# Altium PCB PCB2.PcbDoc (part 1 of 2)
Units mm, origin at the board's own origin, x right, y up, seen from the top; angles counter-clockwise.
Board outline 85.12 x 55.68 mm, 2 copper layers (Top Layer, Bottom Layer), stack 1.569 mm thick; 61 components, 48 nets, 258 pads, 369 vias.
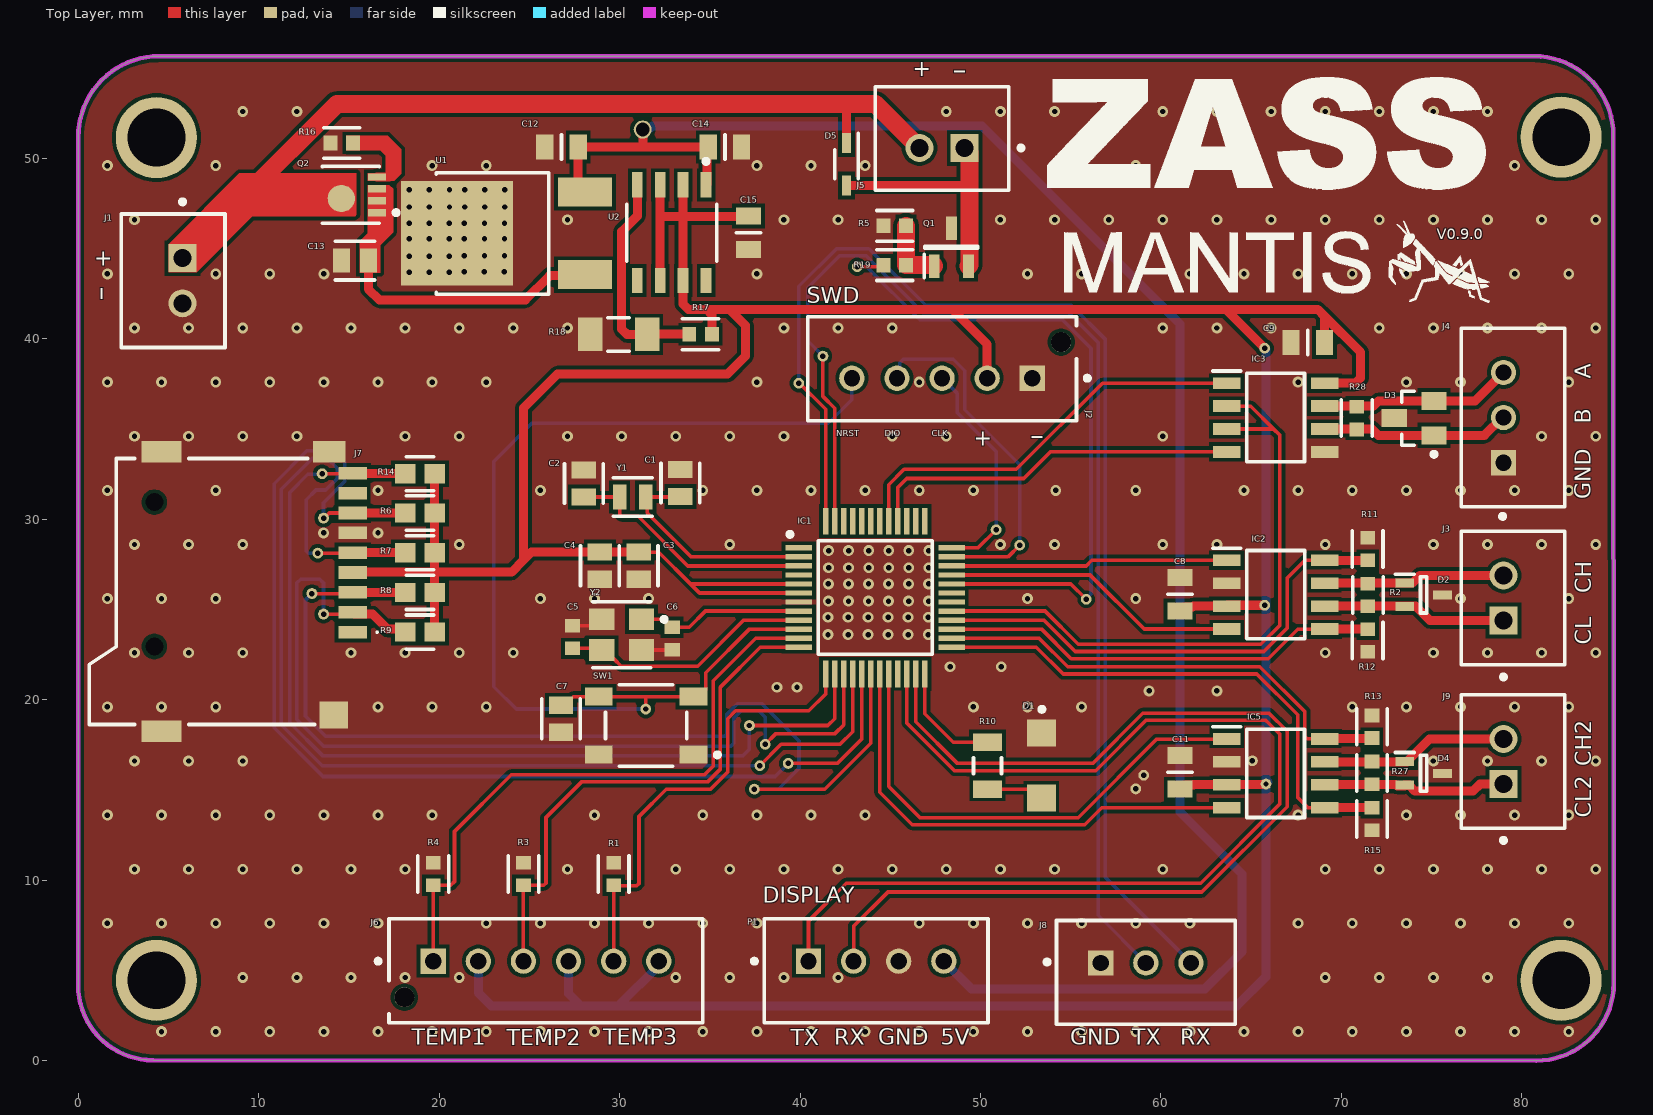
[diagram p0: Top Layer view]
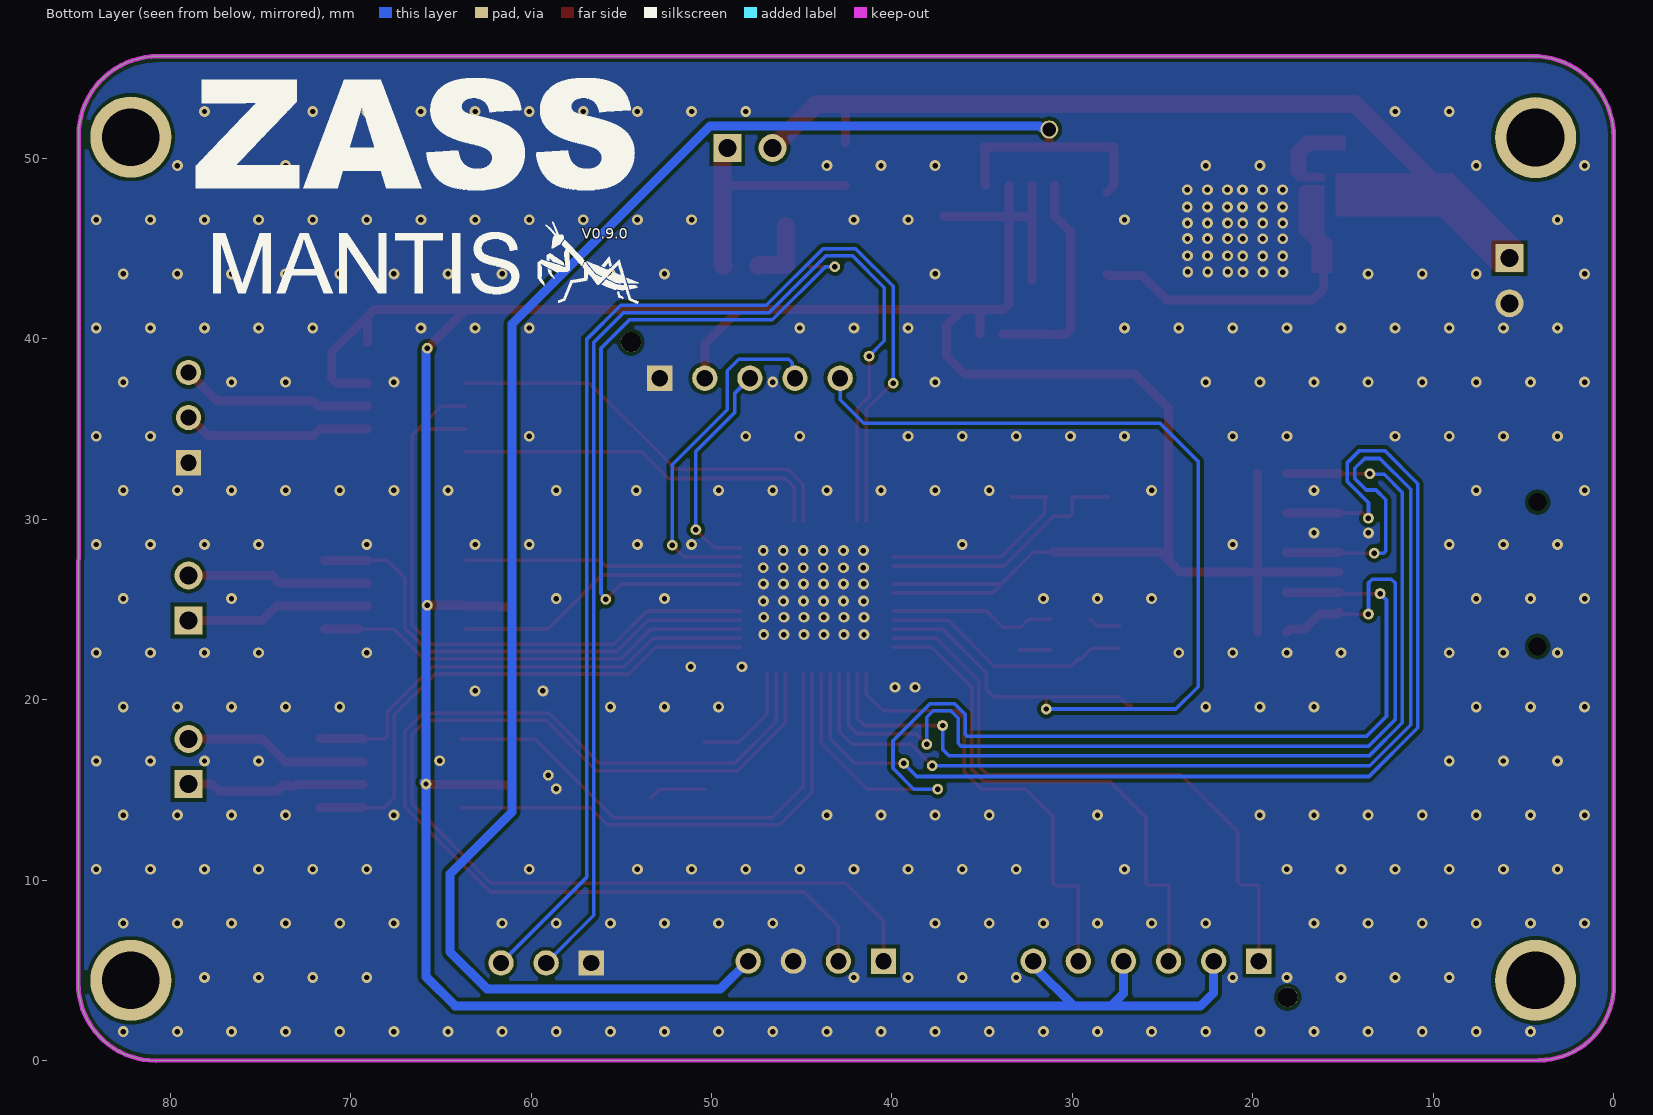
[diagram p1: Bottom Layer view, seen from below]
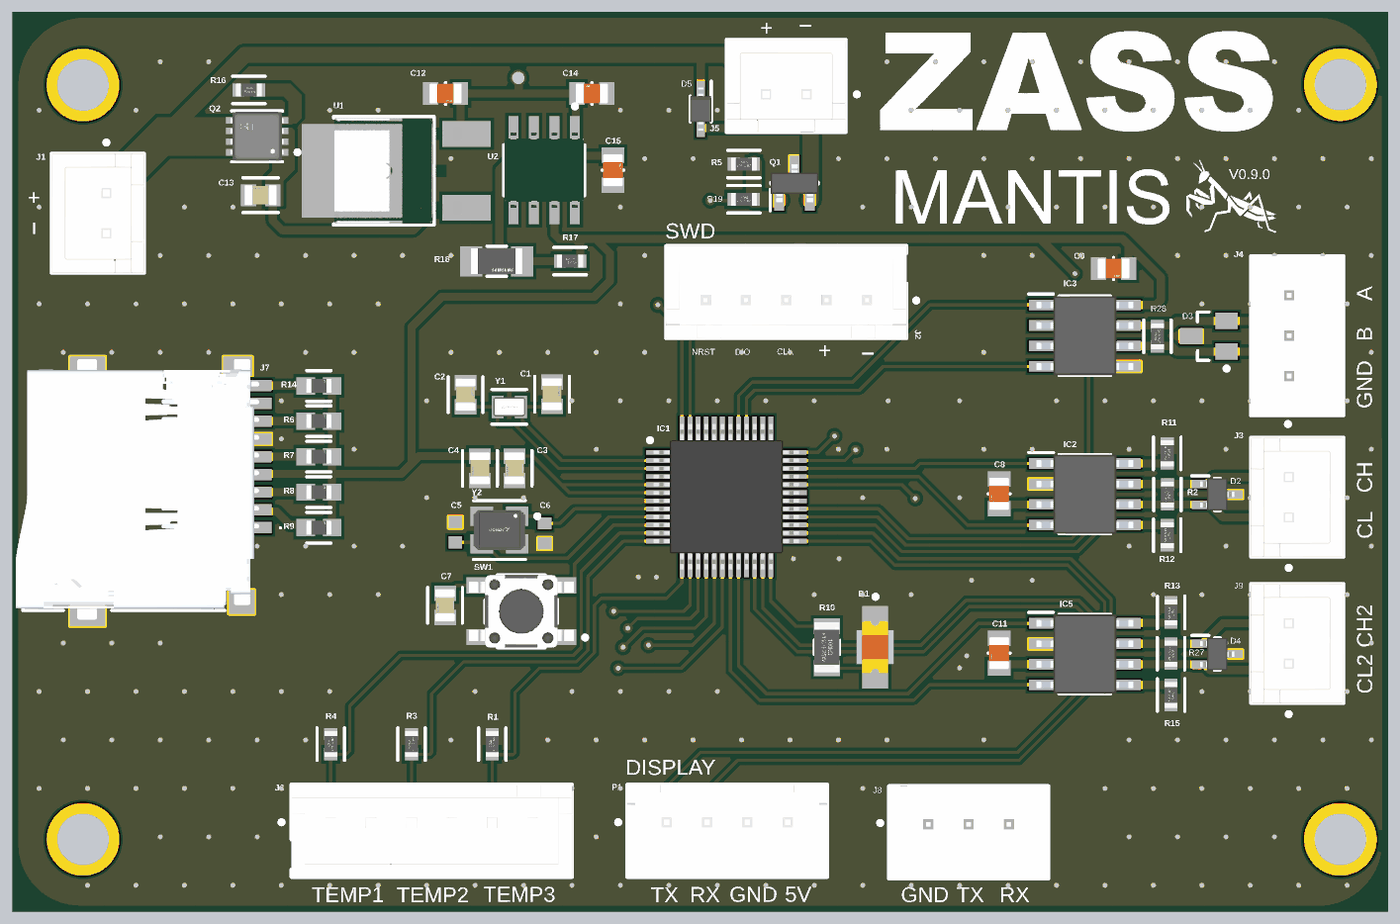
[diagram p2: 3D render of the assembled board from above, using the file's embedded part models]

## Layer stack, top to bottom
Top Solder: solder mask 0.0254, SM-001, Dk 4
Top Layer: signal copper 0.035
Dielectric 1: core 1.4986, Core-043, Dk 4.3
Bottom Layer: signal copper 0.035
Bottom Solder: solder mask 0.0254, SM-001, Dk 4

## Board outline
4.133,0.011 cw(c4.133,4.163) -0.02,4.163 -0.017,51.184 cw(c4.464,51.184) 4.464,55.665 80.681,55.665 cw(c80.681,51.269) 85.077,51.269 85.099,4.284 cw(c80.805,4.284) 80.805,-0.011

## Design rules (kind name [scope] priority, off if disabled: settings)
Clearance [All] p1: gap=0.2 ignorepadtopadclearanceinfootprint=FALSE
PolygonConnect PolygonConnect_4 [All vs IsNamedPolygon('Top Layer-GND')] p1: connectstyle=Direct reliefconductorwidth=0.254 reliefentries=4 polygonreliefangle="90 Angle" airgapwidth=0.254
PolygonConnect PolygonConnect_3 [All vs IsNamedPolygon('Top Layer-GND')] p2: connectstyle=Direct reliefconductorwidth=0.254 reliefentries=4 polygonreliefangle="90 Angle" airgapwidth=0.254
PolygonConnect PolygonConnect_2 [All vs IsNamedPolygon('Bottom Layer-GND')] p3: connectstyle=Direct reliefconductorwidth=0.254 reliefentries=4 polygonreliefangle="90 Angle" airgapwidth=0.254
PolygonConnect PolygonConnect_1 [All vs IsNamedPolygon('Top Layer-GND')] p4: connectstyle=Direct reliefconductorwidth=0.254 reliefentries=4 polygonreliefangle="90 Angle" airgapwidth=0.254
PolygonConnect [All] p5: connectstyle=Relief reliefconductorwidth=0.254 reliefentries=4 polygonreliefangle="90 Angle" airgapwidth=0.254
RoutingVias [All] p1: holewidth=0.711 width=1.27 viastyle="Through Hole" minholewidth=0.711 minwidth=1.27 maxholewidth=0.711 maxwidth=1.27
SolderMaskExpansion [All] p1: expansion=0.102 istentingtop=FALSE
SupplyNets "Schematic Supply Nets_2" [InNet('GND')] p1: voltage=0.000
SupplyNets "Schematic Supply Nets_1" [InNet('+5')] p2: voltage=0.000
SupplyNets "Schematic Supply Nets" [InNet('VDD')] p3: voltage=0.000
Width [All] p1: maxlimit=1 minlimit=0.2 preferedwidth=0.5 minimp=50.000000 maximp=50.000000 favimp=50.000000
30 further rules are at their usual default settings.

## Classes and differential pairs
component class U_STM32G0B1CBT6TR: C1 C2 C3 C4 C5 C6 C7 D1 IC1 R10 SW1 Y1 Y2
component class U_POWER: C12 C13 C14 C15 Q2 R16 R17 R18 U1 U2
component class U_COMM: C8 C9 C11 D2 D3 D4 IC2 IC3 IC5 R11 R12 R13 R15
component class MAIN: D5 J1 J2 J3 J4 J5 J6 J7 J8 J9 P1 Q1 R1 R2 R3 R4 R5 R6 R7 R8 R9 R19 R27 R28

## Components (designator, comment, footprint, x,y, rotation, side; value= is the part's Value field where it differs from the comment)
C1 "C0805C519D3HACTU" FP-C0805C-DN-MFG 33.362,32.012 r270 top value="5.1 pF"
C2 "C0805C519D3HACTU" FP-C0805C-DN-MFG 28.009,31.982 r270 top value="5.1 pF"
C3 "C0805C104K5RACTU" FP-C0805C-DN-MFG 31.044,27.423 r90 top value="0.10 μF"
C4 "C0805C104K5RACTU" FP-C0805C-DN-MFG 28.899,27.423 r90 top value="0.10 μF"
C5 "GRM1885C1H100JA01D" CAPC1608X90X35LL10T15 27.379,23.465 r270 top
C6 "GRM1885C1H100JA01D" CAPC1608X90X35LL10T15 32.907,23.391 r90 top
C7 "C0805C104K5RACTU" FP-C0805C-DN-MFG 26.74,18.939 r90 top value="0.10 μF"
C8 "CC0805KRX7R5BB104" FP-CC0805-EA-MFG 61.052,25.842 r90 top
C9 "CC0805KRX7R5BB104" FP-CC0805-EA-MFG 68.138,39.8 r180 top
C11 "CC0805KRX7R5BB104" FP-CC0805-EA-MFG 61.052,15.977 r90 top
C12 "CC0805KRX7R5BB104" FP-CC0805-EA-MFG 26.77,50.631 r180 top
C13 "C0805C104K5RACTU" FP-C0805C-DN-MFG 15.321,44.337 r0 top value="0.10 μF"
C14 "CC0805KRX7R5BB104" FP-CC0805-EA-MFG 35.831,50.631 r0 top
C15 "CC0805KRX7R5BB104" FP-CC0805-EA-MFG 37.136,45.883 r270 top
D1 "LTST-C230EKT" FP-LTST-C230EKT-MFG 53.371,16.34 r270 top
D2 "ESDCAN06-2BWY" SOT65P210X110-3N 74.56,25.802 r0 top
D3 "SM712.TCT" SMTC-SOT23-3_V 74.035,35.6 r180 top
D4 "ESDCAN06-2BWY" SOT65P210X110-3N 74.56,15.917 r0 top
D5 "1N4007WS" SOD2613X110N 42.573,49.672 r270 top
IC1 "STM32G0B1CBT6TR" QFP50P900X900X160-48N 44.16,25.66 r0 top
IC2 "TCAN3414DR" SOIC127P600X175-8N 66.357,25.818 r0 top
IC3 "SP3485EN-L" SOIC127P600X175-8N 66.357,35.635 r0 top
IC5 "TCAN3414DR" SOIC127P600X175-8N 66.357,15.917 r0 top
J1 "B2B-XH-A(LF)(SN)" FP-B2B-XH-A_LF_SN-MFG 5.24,43.22 r270 top
J2 "B5B-XH-AM(LF)(SN)" FP-B5B-XH-AM_LF_SN-MFG 47.865,38.34 r0 top
J3 "B2B-XH-A(LF)(SN)" FP-B2B-XH-A_LF_SN-MFG 79.508,25.632 r90 top
J4 "B3B-XH-A(LF)(SN)" FP-B3B-XH-A_LF_SN-MFG 79.508,35.635 r90 top
J5 "S2B-XH-A(LF)(SN)" FP-B2B-XH-A_LF_SN-MFG 47.865,51.105 r180 top
J6 "B6B-XH-AM(LF)(SN)" FP-B6B-XH-AM_LF_SN-MFG 25.909,4.975 r180 top
J7 "MSD-4-A" MSD4A 8.299,25.993 r270 top
J8 "B3B-XH-A(LF)(SN)" FP-B3B-XH-A_LF_SN-MFG 59.16,4.88 r0 top
J9 "B2B-XH-A(LF)(SN)" FP-B2B-XH-A_LF_SN-MFG 79.508,16.572 r90 top
P1 "B4B-XH-A(LF)(SN)" FP-B4B-XH-A_LF_SN-MFG 44.21,4.975 r180 top
Q1 "AO3422" SOT95P237X112-3N 48.38,45.08 r90 top
Q2 "SI7113ADN-T1-GE3" FP-S16-2667-SINGLE-MFG 15.1,47.982 r180 top
R1 "CRGCQ0603J10K" FP-CRGCQ0603-IPC_C 29.659,10.34 r90 top value=10KΩ
R2 "CRGCQ0603F120R" FP-CRGCQ0603-IPC_C 71.468,25.802 r270 top value=120Ω
R3 "CRGCQ0603J10K" FP-CRGCQ0603-IPC_C 24.659,10.34 r90 top value=10KΩ
R4 "CRGCQ0603J10K" FP-CRGCQ0603-IPC_C 19.659,10.34 r90 top value=10KΩ
R5 "CRGCQ0603J10K" FP-CRGCQ0603-IPC_C 45.241,46.265 r0 top value=10KΩ
R6 "CRCW06034K70FKEA" FP-CRCW0603-e3-IPC_A 18.926,30.343 r0 top
R7 "CRCW06034K70FKEA" FP-CRCW0603-e3-IPC_A 18.926,28.143 r0 top
R8 "CRCW06034K70FKEA" FP-CRCW0603-e3-IPC_A 18.926,25.943 r0 top
R9 "CRCW06034K70FKEA" FP-CRCW0603-e3-IPC_A 18.926,23.743 r0 top
R10 "CRGCQ1206F1K0" FP-CRGCQ1206-IPC_C 50.383,16.34 r270 top value=1KΩ
R11 "CRGCQ0603J10K" FP-CRGCQ0603-IPC_C 71.457,28.348 r270 top value=10KΩ
R12 "CRGCQ0603J10K" FP-CRGCQ0603-IPC_C 71.457,23.277 r270 top value=10KΩ
R13 "CRGCQ0603J10K" FP-CRGCQ0603-IPC_C 71.692,18.497 r270 top value=10KΩ
R14 "CRCW06034K70FKEA" FP-CRCW0603-e3-IPC_A 18.926,32.52 r0 top (schematic designator R6)
R15 "CRGCQ0603J10K" FP-CRGCQ0603-IPC_C 71.692,13.385 r270 top value=10KΩ
R16 "CRGCQ0603F1K2" FP-CRGCQ0603-IPC_C 14.59,50.852 r0 top value=1.2KΩ
R17 "CRGCQ0603F1K2" FP-CRGCQ0603-IPC_C 34.481,40.254 r0 top value=1.2KΩ
R18 "RC3216J202CS" FP-RC3216-IPC_A 29.936,40.243 r0 top
R19 "CRGCQ0603F1K2" FP-CRGCQ0603-IPC_C 45.241,44.079 r0 top value=1.2KΩ
R27 "CRGCQ0603F120R" FP-CRGCQ0603-IPC_C 71.692,15.939 r270 top value=120Ω (schematic designator R?)
R28 "CRGCQ0603F120R" FP-CRGCQ0603-IPC_C 70.851,35.6 r90 top value=120Ω
SW1 "PTS647SK38SMTR2LFS" FP-PTS647SK38SMTR2LFS-MFG 31.459,18.564 r180 top
U1 "MC7805CDTRKG" FP-369C-MFG 23.77,45.844 r90 top
U2 "LM317LD13TR" FP-SO-8-0016023-MFG 32.876,45.883 r270 top
Y1 "ABS06-32.768KHZ-9-1-T" FP-ABS06-MFG 30.713,31.232 r0 top
Y2 "ABM8G-24.000MHZ-B4Y-T" FP-ABM8G-MFG 30.107,23.601 r180 top

## Footprints (in the part's own frame and the unit in brackets; to place one, negate y for a bottom-side part, rotate by r counter-clockwise, add the part's x,y. Pads: shape width x height; smd on the part's side, far side on the other; paste and mask are expansions set on the pad)
CAPC1608X90X35LL10T15 [mm] "Chip Capacitor, 2-Leads, Body 1.60x0.80mm, IPC High Density"
  rect 0.75x0.85 smd: 1(-0.625,0) 2(0.625,0)
  body extent -0.85,-0.45 0.85,0.45, height 0.9
FP-369C-MFG [mm]
  rect 1.6x3 smd paste+0 mask+0: 1(-2.285,-4.3) 3(2.285,-4.3)
  rect 5.8x6.2 smd paste+0 mask+0: 4(0,2.79)
  silkscreen extent -3.36,-2.28 3.36,3.94, body extent -3.46,-5.9 3.46,5.99, height 0.25
FP-ABM8G-MFG [mm]
  rect 1.4x1.2 smd paste+0 mask+0: 1(-1.1,-0.85) 2(1.1,-0.85) 3(1.1,0.85) 4(-1.1,0.85)
  silkscreen extent -2.48,-1.83 1.6,1.83, body extent -1.9,-1.55 1.9,1.55, height 0.25
FP-ABS06-MFG [mm]
  rect 0.75x1.4 smd paste+0 mask+0: 1(-0.725,0) 2(0.725,0)
  silkscreen extent -1.07,-1.07 1.07,1.07, body extent -1.2,-0.8 1.2,0.8, height 0.25
FP-B2B-XH-A_LF_SN-MFG [mm]
  rect 1.55x1.55 hole 1 paste-2539.97 mask+0: 1(-1.25,0.525)
  round 1.55 hole 1 paste-2539.97 mask+0: 2(1.25,0.525)
  silkscreen extent -4.5,-2.88 3.7,2.88, body extent -3.8,-2.98 3.8,2.98, height 0.25
FP-B3B-XH-A_LF_SN-MFG [mm]
  rect 1.4x1.4 hole 0.9 paste-2539.97 mask+0: 1(-2.5,0.525)
  round 1.4 hole 0.9 paste-2539.97 mask+0: 2(0,0.525) 3(2.5,0.525)
  silkscreen extent -5.6,-2.88 4.95,2.88, body extent -5.05,-2.98 5.05,2.98, height 0.25
FP-B4B-XH-A_LF_SN-MFG [mm]
  rect 1.4x1.4 hole 0.9 paste-2539.97 mask+0: 1(3.75,-0.525)
  round 1.4 hole 0.9 paste-2539.97 mask+0: 2(1.25,-0.525) 3(-1.25,-0.525) 4(-3.75,-0.525)
  silkscreen extent -6.2,-2.88 6.87,2.88, body extent -6.3,-2.98 6.3,2.98, height 0.25
FP-B5B-XH-AM_LF_SN-MFG [mm]
  rect 1.4x1.4 hole 0.9 paste-2539.97 mask+0: 1(5,-0.525)
  round 1.4 hole 0.9 paste-2539.97 mask+0: 2(2.5,-0.525) 3(0,-0.525) 4(-2.5,-0.525) 5(-5,-0.525)
  round 1.1 hole 1.1 unplated paste-2539.97 mask+0: ""(6.6,1.475)
  silkscreen extent -7.45,-2.88 8.18,2.88, body extent -7.55,-2.98 7.55,2.98, height 0.25
FP-B6B-XH-AM_LF_SN-MFG [mm]
  rect 1.4x1.4 hole 0.9 paste-2539.97 mask+0: 1(6.25,-0.525)
  round 1.4 hole 0.9 paste-2539.97 mask+0: 2(3.75,-0.525) 3(1.25,-0.525) 4(-1.25,-0.525) 5(-3.75,-0.525) 6(-6.25,-0.525)
  round 1.1 hole 1.1 unplated paste-2539.97 mask+0: ""(7.85,1.475)
  silkscreen extent -8.7,-2.88 9.42,2.88, body extent -8.8,-2.98 8.8,2.98, height 0.25
FP-C0805C-DN-MFG [mm]
  rect 0.95x1.35 smd paste+0 mask+0: 1(-0.75,0) 2(0.75,0)
  silkscreen extent -1.1,-1.07 1.1,1.07, body extent -1.4,-0.85 1.4,0.85, height 0.25
FP-CC0805-EA-MFG [mm]
  rect 0.95x1.4 smd paste+0 mask+0: 1(-0.925,0) 2(0.925,0)
  silkscreen extent 0,-0.67 0,0.67, body extent -1.73,-1.17 1.73,1.17, height 0.25
FP-CRCW0603-e3-IPC_A [mm]
  rect 1.135x1.062 smd paste+0 mask+0: 1(-0.815,0) 2(0.815,0)
  silkscreen extent -0.75,-0.95 0.75,0.95, body extent -0.77,-0.43 0.77,0.43, height 0.5
FP-CRGCQ0603-IPC_C [mm]
  rect 0.758x0.812 smd paste+0 mask+0: 1(-0.627,0) 2(0.627,0)
  silkscreen extent -1.01,-0.85 1.01,0.85, body extent -1.11,-0.55 1.11,0.55, height 0.25
FP-CRGCQ1206-IPC_C [mm]
  rect 0.956x1.61 smd paste+0 mask+0: 1(-1.301,0) 2(1.301,0)
  silkscreen extent -0.45,-0.77 0.45,0.77, body extent -1.88,-0.95 1.88,0.95, height 0.25
FP-LTST-C230EKT-MFG [mm]
  rect 1.5x1.6 smd paste+0 mask+0: 1(-1.8,0) 2(1.8,0)
  silkscreen extent -3.25,-0.1 -3,0.15, body extent -2.65,-0.95 2.65,0.95, height 0.25
FP-PTS647SK38SMTR2LFS-MFG [mm]
  rect 1.55x1 smd paste+0 mask+0: 1(-2.625,1.6) 2(2.625,1.6) 3(-2.625,-1.6) 4(2.625,-1.6)
  silkscreen extent -4.08,-2.25 2.25,2.25, body extent -3.5,-2.35 3.5,2.35, height 0.25
FP-RC3216-IPC_A [mm]
  rect 1.355x1.858 smd paste+0 mask+0: 1(-1.576,0) 2(1.576,0)
  silkscreen extent -0.6,-0.93 0.6,0.93, body extent -2.75,-1.43 2.75,1.43, height 0.25
FP-S16-2667-SINGLE-MFG [mil]
  rect 39x16 smd paste+0 mask+0: 1(-56.5,39) 2(-56.5,13) 3(-56.5,-13) 4(-56.5,-39)
  round 59.4 smd paste+0 mask+0: 5-6-7-8(21,8)
  Top Layer region: -12,44 46,44 46,47 76,47 76,31 56,31 56,21 76,21 76,5 56,5 56,-5 76,-5 76,-21 56,-21 56,-31 76,-31 76,-47 46,-47 46,-44 -12,-44
  silkscreen extent -103,-62 62,62, body extent -80,-71 80,71, height 10
FP-SO-8-0016023-MFG [mm]
  rect 1.4x0.6 smd paste+0 mask+0: 1(-2.65,1.905) 2(-2.65,0.635) 3(-2.65,-0.635) 4(-2.65,-1.905) 5(2.65,-1.905) 6(2.65,-0.635) 7(2.65,0.635) 8(2.65,1.905)
  silkscreen extent -4.08,-2.5 1.58,2.5, body extent -3.45,-2.6 3.45,2.6, height 0.25
MSD4A [mm]
  rect 0.7x1.6 smd: 1(2.25,6.9) 2(1.15,6.9) 3(0.05,6.9) 4(-1.05,6.9) 5(-2.15,6.9) 6(-3.25,6.9) 7(-4.35,6.9) 8(-5.45,6.9) CD1(-6.55,6.9)
  rect 1.5x1.6 smd: G1(6.85,5.85)
  rect 1.2x2.2 smd: G2(7.75,-3.7) G3(-7.75,-3.7)
  rect 1.2x1.8 smd: G4(-7.75,5.6)
  round 0.5 hole 1 unplated: MH1(3.05,-4.1) MH2(-4.95,-4.1)
  silkscreen extent -7.37,-7.7 7.37,8.3, body extent -8.2,-8.13 7.95,6.92, height 1.8
QFP50P900X900X160-48N [mm]
  rect 1.475x0.3 smd: 1(-4.238,2.75) 2(-4.238,2.25) 3(-4.238,1.75) 4(-4.238,1.25) 5(-4.238,0.75) 6(-4.238,0.25) 7(-4.238,-0.25) 8(-4.238,-0.75) 9(-4.238,-1.25) 10(-4.238,-1.75) 11(-4.238,-2.25) 12(-4.238,-2.75) 25(4.238,-2.75) 26(4.238,-2.25) 27(4.238,-1.75) 28(4.238,-1.25) 29(4.238,-0.75) 30(4.238,-0.25) 31(4.238,0.25) 32(4.238,0.75) 33(4.238,1.25) 34(4.238,1.75) 35(4.238,2.25) 36(4.238,2.75)
  rect 0.3x1.475 smd: 13(-2.75,-4.238) 14(-2.25,-4.238) 15(-1.75,-4.238) 16(-1.25,-4.238) 17(-0.75,-4.238) 18(-0.25,-4.238) 19(0.25,-4.238) 20(0.75,-4.238) 21(1.25,-4.238) 22(1.75,-4.238) 23(2.25,-4.238) 24(2.75,-4.238) 37(2.75,4.238) 38(2.25,4.238) 39(1.75,4.238) 40(1.25,4.238) 41(0.75,4.238) 42(0.25,4.238) 43(-0.25,4.238) 44(-0.75,4.238) 45(-1.25,4.238) 46(-1.75,4.238) 47(-2.25,4.238) 48(-2.75,4.238)
  silkscreen extent -4.85,-3.15 3.15,3.62, body extent -4.5,-4.5 4.5,4.5, height 1.41
SMTC-SOT23-3_V [mm] "SOT23, 3-Leads, Body 2.92x2.37mm, Pitch 0.95mm"
  rect 1.4x1 smd: 1(-1.1,0.95) 2(-1.1,-0.95) 3(1.1,0)
  silkscreen extent -1.23,-1.5 0.7,2.12, body extent -0.7,-1.52 0.7,1.52, height 1.12
SOD2613X110N [mm]
  rect 1.1x0.5 smd: 1(-1.175,0) 2(1.175,0)
  silkscreen extent -1.73,-0.65 0.8,0.65, body extent -1.33,-0.65 1.33,0.65, height 1.1
SOIC127P600X175-8N [mm]
  rect 1.525x0.65 smd: 1(-2.712,1.905) 2(-2.712,0.635) 3(-2.712,-0.635) 4(-2.712,-1.905) 5(2.712,-1.905) 6(2.712,-0.635) 7(2.712,0.635) 8(2.712,1.905)
  silkscreen extent -3.47,-2.45 1.6,2.58, body extent -3,-2.45 3,2.45, height 1.75
SOT65P210X110-3N [mm]
  rect 1.05x0.5 smd: 1(-1.05,0.65) 2(-1.05,-0.65) 3(1.05,0)
  silkscreen extent -1.58,-1 0.18,1.15, body extent -1.05,-1 1.05,1, height 1.1
SOT95P237X112-3N [mm]
  rect 1.3x0.6 smd: 1(-1.05,0.95) 2(-1.05,-0.95) 3(1.05,0)
  silkscreen extent -1.7,-1.46 0.05,1.5, body extent -1.18,-1.46 1.18,1.46, height 1.12

## Part data
C1 C2: library part CMP-03020-033346-1, "C0805 5.1 pF X8R 30ppm/°C 0.5 pF 25 V", Capacitance="5.1 pF", Manufacturer=KEMET, Package=C0805C-DN, Temperature="-55°C to +125°C", Temperature Characteristic=X8R, Temperature Coefficient=30ppm/°C, Temperature Range High=+125°C, Temperature Range Low=-55°C, Tolerance="0.5 pF", Voltage Rating="25 V", Automotive=No, Category=Cap, ComponentLink2Description=Datasheet, ComponentLink2URL=https://content.kemet.com/datasheets/KEM_C1003_C0G_SMD.pdf, Device Class L1="Passive Components", Device Class L2=Capacitors, Device Class L3="Ceramic Capacitors", Height=0.88mm, Ipc Land Pattern Name=CAPC200125X78, Lead Free=Yes, Manufacturer Part Number=C0805C519D3HACTU, Material=Ceramic, Octopart=https://octopart.com/c0805c519d3hactu-kemet-88727353, RoHS=TRUE
C3 C4 C7 C13: library part CMP-2007-00279-2, "CAP CER 0.1UF 50V X7R 0805", Capacitance="0.10 μF", Manufacturer=KEMET, Package=C0805C-DN, Temperature="-55°C to +125°C", Temperature Characteristic=X7R, Temperature Coefficient=30ppm/°C, Temperature Range High=+125°C, Temperature Range Low=-55°C, Tolerance=0.1, Voltage Rating="50 V", Automotive=No, Category=Cap, ComponentLink2Description=Datasheet, ComponentLink2URL=https://content.kemet.com/datasheets/KEM_C1003_C0G_SMD.pdf, Device Class L1="Passive Components", Device Class L2=Capacitors, Device Class L3="Ceramic Capacitors", Digikey Description="CAP CER 0.1UF 50V X7R 0805", Height=0.88mm, Ipc Land Pattern Name=CAPC200125X78, Lead Free=Yes, Manufacturer Part Number=C0805C104K5RACTU, Material=Ceramic, Mouser Description="Cap Ceramic 0.1uF 50V X7R 10% SMD 2.0 x 1.2 mm 125 C Paper T/R", Octopart=https://octopart.com/c0805c104k5ractu-kemet-143926, RoHS=TRUE
C5 C6: library part CMP-2006-02592-1, Manufacturer=Murata, Part Number=GRM1885C1H100JA01D
C8 C9 C11 C12 C14 C15: library part CMP-03422-000810-2, "CAP CER X7R 0805", RoHS Compliant=Yes
D1: library part CMP-22017-000030-1, "LED RED CLEAR CHIP SMD", Case Code (Imperial)=1206, Case Code (Metric)=3216, Color=Red, Forward Current=30mA, Forward Voltage=2V, Lens Color=Colorless, Max Operating Temperature=85°C, Min Operating Temperature=-55°C, Package Quantity=1, Power Dissipation=100mW, Reverse Voltage=5V, Test Current=10mA, Case/Package=1206, Depth=1.6mm, Dominant Wavelength=621nm, Height=1.1mm, Illumination Color=Red, Lead Free="Lead Free", Length=3.2mm, Lens Style=Diffused, Lens Transparency=Clear, Luminous Intensity=6mcd, Mount="Surface Mount", Number of Elements=1, Number of LEDs=1, Number of Pins=2, Packaging="Tape and Reel", Power Rating=100mW, Radiation Hardening=No, Viewing Angle=130°, Wavelength=630nm, Width=1.6mm
D2 D4: "TVS Diode (Bi-directional)", Manufacturer_Name=STMicroelectronics, Mouser Part Number=511-ESDCAN06-2BWY, Arrow Part Number=ESDCAN06-2BWY, Arrow Price/Stock=https://www.arrow.com/en/products/esdcan06-2bwy/stmicroelectronics?utm_currency=USD&region=europe, Datasheet Link=https://www.st.com/resource/en/datasheet/esdcan03-2bwy.pdf, Height=1.1mm, Manufacturer_Part_Number=ESDCAN06-2BWY, Mouser Price/Stock=https://www.mouser.co.uk/ProductDetail/STMicroelectronics/ESDCAN06-2BWY?qs=u4fy%2FsgLU9P2WkvcJBEfoQ%3D%3D
D3: library part CMP-2000-05357-1, "Asymmetrical TVS Diode for Extended Common-Mode RS-485, 400 W, -55 to 125 degC, 3-Pin SOT23, RoHS, Tape and Reel", Clamping Voltage=26V/12V, Leakage Current=1uA/20uA, Leakage Current (Max)=0.02uA, Manufacturer=Semtech, Operating Temp Range=-55Cto125C, Operating Temperature Classification=Military, Operating Temperature Max Deg. C=125C, Operating Temperature Min Deg. C=-55C, Package / Case=SOT-23, Package Description="3-Pin Small Outline Transistor, Body 2.9 x 1.3 mm, Pitch 0.95 mm", Package Reference=SOT23-3, Peak Pulse Current=17A, Peak Pulse Power Dissipation=400W, Reverse Breakdown Voltage=13.3V, Reverse Stand-off Voltage=12V, Test Current (It)=1mA, Working Voltage=12V/7V, Configuration=Dual, Datasheet URL=https://datasheet.ciiva.com/18065/getdatasheetpartid-110620-18065348.pdf, Datasheet Version=Nov-04, Direction Type=Bi-Directional, Manufacturer URL=http://www.semtech.com/, Mounting=SurfaceMount, Mounting Style=SurfaceMount, Number of Elements=2, Packaging=TapeandReel, Pin Count=3, Polarity=Bi-Directional, Product Depth (mm)=1.3mm, Product Height (mm)=0.95mm, Product Length (mm)=2.9mm, Rad Hardened=No, Suppressor Type=TVS
D5: "Diode", Manufacturer_Name=MDD, Datasheet Link=https://datasheet.lcsc.com/szlcsc/MDD-Jiangsu-Yutai-Elec-1N4007WS_C193404.pdf, Height=1.1mm, Manufacturer_Part_Number=1N4007WS
IC1: "Integrated Circuit", Manufacturer_Name=STMicroelectronics, Mouser Part Number=511-STM32G0B1CBT6TR, Arrow Part Number=STM32G0B1CBT6TR, Arrow Price/Stock=https://www.arrow.com/en/products/stm32g0b1cbt6tr/stmicroelectronics?utm_currency=USD&region=nac, Datasheet Link=https://www.st.com/resource/en/datasheet/stm32g0b1cc.pdf, Height=1.6mm, Manufacturer_Part_Number=STM32G0B1CBT6TR, Mouser Price/Stock=https://www.mouser.co.uk/ProductDetail/STMicroelectronics/STM32G0B1CBT6TR?qs=HoCaDK9Nz5cqFCA6TLpp%252Bw%3D%3D
IC2 IC5: "Integrated Circuit", Manufacturer_Name="Texas Instruments", Mouser Part Number=595-TCAN3414DR, Arrow Part Number=TCAN3414DR, Arrow Price/Stock=https://www.arrow.com/en/products/tcan3414dr/texas-instruments?utm_currency=USD&region=nac, Datasheet Link=https://www.ti.com/lit/ds/symlink/tcan3414.pdf?ts=1713723144569&ref_url=https%253A%252F%252Fwww.mouser.ch%252F, Height=1.75mm, Manufacturer_Part_Number=TCAN3414DR, Mouser Price/Stock=https://www.mouser.co.uk/ProductDetail/Texas-Instruments/TCAN3414DR?qs=mELouGlnn3egF2AojRJddw%3D%3D
IC3: "Integrated Circuit", Manufacturer_Name=EXAR, Mouser Part Number=701-SP3485EN-L, Arrow Part Number=SP3485EN-L, Arrow Price/Stock=https://www.arrow.com/en/products/sp3485en-l/exar, Datasheet Link=https://datasheet.datasheetarchive.com/originals/distributors/Datasheets-DGA14/1190127.pdf, Height=1.75mm, Manufacturer_Part_Number=SP3485EN-L, Mouser Price/Stock=https://www.mouser.com/Search/Refine.aspx?Keyword=701-SP3485EN-L
J1 J3 J5 J9: library part CMP-2000-05888-3, "CONN HEADER VERT 2POS 2.5MM", Color=Natural, Contact Resistance=20mR, Current Rating=3A, Housing Color=White, Insulation Resistance=1GR, Max Operating Temperature=85°C, Max Voltage Rating (AC)=250V, Min Operating Temperature=-25°C, Connector Type="Male Pin", Contact Material=Brass, Contact Plating=Tin, Contact Type="Male Pin", Depth=5.75mm, Fastening Type=Detent, Housing Material=Polyamide, Lead Free="Lead Free", Lead Pitch=2.5mm, Length=7.4mm, Max Current Rating=3A, Max Voltage Rating (DC)=250V, Mount="Through Hole", Number of Contacts=2, Number of Positions=2, Number of Rows=1, Orientation=Straight, Packaging=Bulk, Pitch=2.5mm, REACH SVHC="No SVHC", Series=XH, Termination=Solder, Voltage Rating=250V, Voltage Rating (AC)=250V, Wire/Cable Gauge=22AWG
J2: library part CMP-17439-000304-1, "CONN HEADER VERT 5POS 2.5MM", Color=Green, Contact Resistance=20mR, Flammability Rating="UL94 V-0", Housing Color=White, Insulation Color=Natural, Max Current Rating=3A, Max Operating Temperature=85°C, Max Voltage Rating (AC)=250V, Min Operating Temperature=-25°C, Connector Type=Header, Contact Finish - Mating=TIN, Contact Material=Brass, Contact Plating=Copper, Contact Shape=Square, Contact Type="Male Pin", Depth=5.75mm, Fastening Type=Detent, Housing Material=Polyamide, Insulation Material=Nylon, Lead Free="Lead Free", Length=14.9mm, Mated Stacking Heights=9.8mm, Mount="Through Hole", Number of Positions=5, Number of Rows=1, Orientation=Straight, Packaging=Bulk, Pitch=2.5mm, Series=XH, Termination=Solder, Voltage Rating=250V
J4 J8: library part CMP-17439-000014-3, "CONN HEADER VERT 3POS 2.5MM", Color=Natural, Contact Resistance=20mR, Current Rating=3A, Flammability Rating="UL94 V-0", Housing Color=White, Insulation Resistance=1GR, Max Operating Temperature=85°C, Max Voltage Rating (AC)=250V, Min Operating Temperature=-25°C, Connector Type=Header, Contact Finish - Mating=TIN, Contact Material=Brass, Contact Plating=Tin, Contact Shape=Square, Contact Type="Male Pin", Depth=5.75mm, Fastening Type=Detent, Gender=Male, Housing Material=Polyamide, Insulation Color=Natural, Insulation Material=Nylon, Lead Free="Lead Free", Lead Pitch=2.5mm, Length=9.9mm, Max Current Rating=3A, Max Voltage Rating (DC)=250V, Mount="Through Hole", Number of Contacts=3, Number of Positions=3, Number of Rows=1, Orientation=Straight, Packaging=Bulk, Pitch=2.5mm, REACH SVHC="No SVHC", Series=XH, Termination=Solder, Voltage Rating=250V, Voltage Rating (AC)=250V, Wire/Cable Gauge=22AWG
J6: library part CMP-17439-000167-1, "CONN HEADER VERT 6POS 2.5MM", Current Rating=3A, Flammability Rating="UL94 V-0", Insulation Color=Natural, Max Operating Temperature=85°C, Min Operating Temperature=-25°C, Voltage Rating=250V, Connector Type=Header, Contact Finish - Mating=TIN, Contact Material=Brass, Contact Plating=Copper, Contact Shape=Square, Contact Type="Male Pin", Fastening Type=Detent, Height=7mm, Insulation Material=Nylon, Length=17.4mm, Mated Stacking Heights=9.8mm, Mount="Through Hole", Number of Pins=6, Number of Poles=6, Number of Positions=6, Number of Rows=1, Packaging=Bulk, Pitch=2.5mm, Series=XH, Shape=Straight, Termination=Press-Fit, Width=5.75mm
J7: "Connector", Manufacturer_Name="Same Sky", Mouser Part Number=179-MSD-4-A, Arrow Part Number=MSD-4-A, Arrow Price/Stock=https://www.arrow.com/en/products/msd-4-a/cui-devices?utm_currency=USD&region=nac, Datasheet Link=https://www.sameskydevices.com/product/resource/MSD-4-A.pdf, Height=2mm, Manufacturer_Part_Number=MSD-4-A, Mouser Price/Stock=https://www.mouser.co.uk/ProductDetail/Same-Sky/MSD-4-A?qs=Z%252BL2brAPG1Jll%252BQTi%252Btupg%3D%3D
P1: library part CMP-17439-000250-1, "CONN HEADER VERT 4POS 2.5MM", Color=Natural, Contact Resistance=20mR, Current Rating=3A, Flammability Rating="UL94 V-0", Housing Color=White, Insulation Resistance=1GR, Max Operating Temperature=85°C, Max Voltage Rating (AC)=250V, Min Operating Temperature=-25°C, Package Quantity=500, Connector Type=Header, Contact Finish - Mating=TIN, Contact Material=Brass, Contact Plating=Tin, Contact Shape=Square, Contact Type="Male Pin", Depth=5.75mm, Fastening Type=Detent, Gender=Male, Housing Material=Polyamide, Insulation Color=Natural, Insulation Material=Nylon, Lead Free="Lead Free", Lead Pitch=2.5mm, Length=12.4mm, Mated Stacking Heights=9.8mm, Material=Polyamide, Max Current Rating=3A, Max Voltage Rating (DC)=250V, Mount="Through Hole", Number of Contacts=4, Number of Positions=4, Number of Rows=1, Orientation=Straight, Packaging=Bulk, Pitch=2.5mm, REACH SVHC="No SVHC", Series=XH, Termination=Solder, Voltage Rating=250V, Voltage Rating (AC)=250V, Wire/Cable Gauge=22AWG
Q1: "MOSFET (N-Channel)", Manufacturer_Name="Alpha & Omega Semiconductors", Arrow Part Number=AO3422, Arrow Price/Stock=https://www.arrow.com/en/products/ao3422/alpha-and-omega-semiconductor?region=nac, Datasheet Link=http://aosmd.com/res/data_sheets/AO3422.pdf, Height=1.12mm, Manufacturer_Part_Number=AO3422
Q2: library part CMP-02550-000064-1, "MOSFET P-CH 100V 10.8A 1212-8", Continuous Drain Current=-3.8A, Drain To Source Breakdown Voltage=-100V, Drain To Source Resistance=0.11Ω, Gate To Source Voltage=20V, Input Capacitace At Vds="515pF @ -50V", Manufacturer=Vishay, Max Forward Diode Voltage=-1.2V, Max Junction Temp=+150°C, Package=S16-2667-SINGLE, Power Dissipation=3.5W, Pulse Drain Current=-20A, Temperature="-55°C to +150°C", Temperature Range Low=-55°C, Typ Forward Diode Voltage=-0.8V, Automotive=No, Category=Trans, ComponentLink2Description=Datasheet, ComponentLink2URL=http://www.vishay.com/docs/77678/si7113adn.pdf, Depletion Mode=False, Device Class L1="Discrete Semiconductors", Device Class L2=Transistors, Device Class L3=MOSFETs, Digikey Description="MOSFET P-CH 100V 10.8A 1212-8", Drain To Source Voltage=-100V, Footprint Url=https://www.vishay.com/docs/72597/72597.pdf, Gate Charge At Vgs="10.9nC @ -10V", Height=1.17mm, Lead Free=Yes, Manufacturer Part Number=SI7113ADN-T1-GE3, Number of Channels=1, Number Of P Channels=1, Octopart=https://octopart.com/si7113adn-t1-ge3-vishay-88182558, Reverse Recovery Charge=80nC, Reverse Recovery Time=43ns, RoHS=TRUE, Rthja Max=36°C/W, Standoff Height=0mm, Temperature Range High=+150°C, Threshold Vgs Max=-2.6V, Threshold Vgs Min=-1.1V, Transconductance=8S, Turn Off Delay Time=20ns, Turn On Delay Time=10ns
R1 R3 R4 R5 R11 R12 R13 R15: library part CMP-03211-009884-1, "CRGCQ 0603 10K 5%", Ambient Temperature Range High=+70°C, Manufacturer="TE Connectivity", Package=CRGCQ0603, Power Rating=0.1W, Resistance=10KΩ, Temperature="-55°C to +155°C", Temperature Coefficient=±100ppm/°C, Temperature Range High=+155°C, Temperature Range Low=-55°C, Tolerance=0.05, Voltage Rating=75V, Category=Res, ComponentLink2Description=Datasheet, ComponentLink2URL=https://www.te.com/commerce/DocumentDelivery/DDEController?Action=showdoc&DocId=Data+Sheet%7F1773204-3%7F1%7Fpdf%7FEnglish%7FENG_DS_1773204-3_1.pdf%7F4-2176339-923, Composition="Thick Film", Device Class L1="Passive Components", Device Class L2=Resistors, Device Class L3="Chip SMD Resistors", Digikey Description="CRGCQ 0603 10K 5%", Height=0.55mm, Ipc Land Pattern Name=RESC16080X45, Lead Free=Yes, Manufacturer Part Number=CRGCQ0603J10K, Mouser Description="Res Thick Film 0603 10K Ohm 5% 0.1W(1/10W) ±100ppm/C Pad SMD Automotive T/R", Octopart=https://octopart.com/crgcq0603j10k-te+connectivity-91018097, RoHS=TRUE, Series=CRGCQ
R2 R27 R28: library part CMP-03211-001601-1, "CRGCQ0603 120Ω 1% ±100ppm/°C 75V", Ambient Temperature Range High=+70°C, Manufacturer="TE Connectivity", Package=CRGCQ0603, Power Rating=0.1W, Resistance=120Ω, Temperature="-55°C to +155°C", Temperature Coefficient=±100ppm/°C, Temperature Range High=+155°C, Temperature Range Low=-55°C, Tolerance=0.01, Voltage Rating=75V, Category=Res, ComponentLink2Description=Datasheet, ComponentLink2URL=https://www.te.com/commerce/DocumentDelivery/DDEController?Action=showdoc&DocId=Data+Sheet%7F1773204-3%7F1%7Fpdf%7FEnglish%7FENG_DS_1773204-3_1.pdf%7F4-2176339-482, Composition="Thick Film", Device Class L1="Passive Components", Device Class L2=Resistors, Device Class L3="Chip SMD Resistors", Height=0.55mm, Ipc Land Pattern Name=RESC16080X45, Lead Free=Yes, Manufacturer Part Number=CRGCQ0603F120R, Mouser Description="Res, Aec-Q200, Thick Film, 120R, 1%, 0603", Octopart=https://octopart.com/crgcq0603f120r-te+connectivity-91018039, RoHS=TRUE, Series=CRGCQ
R6 R7 R8 R9 R14: library part CMP-1666-00019-3, "RES Thick Film, 4.7kΩ, 1%, 0.1W, 100ppm/°C, 0603", Case Code (Imperial)=0603, Case Code (Metric)=1608, Max Operating Temperature=155°C, Min Operating Temperature=-55°C, Package Quantity=5000, Power Rating=100mW, Resistance=4.7kR, Temperature Coefficient=100ppm/°C, Tolerance=1%, Voltage Rating=75V, Case/Package=0603, Composition="Thick Film", Contact Plating=Tin, Depth=0.85mm, Height=0.45mm, Lead Free="Lead Free", Length=1.55mm, Military Standard=Not, Mount="Surface Mount", Packaging="Tape and Reel", Termination=SMD/SMT, Voltage Rating (DC)=75V, Weight=7.1E-05oz, Width=0.85mm
R10: library part CMP-03211-006592-1, "CRGCQ1206 1KΩ 0.25W 1% ±100ppm/°C 200V", Ambient Temperature Range High=+70°C, Manufacturer="TE Connectivity", Package=CRGCQ1206, Power Rating=0.25W, Resistance=1KΩ, Temperature="-55°C to +155°C", Temperature Coefficient=±100ppm/°C, Temperature Range High=+155°C, Temperature Range Low=-55°C, Tolerance=0.01, Voltage Rating=200V, Automotive=Yes, Automotive Grade="Grade 685", Category=Res, ComponentLink2Description=Datasheet, ComponentLink2URL=https://www.te.com/commerce/DocumentDelivery/DDEController?Action=showdoc&DocId=Data+Sheet%7F1773204-3%7F1%7Fpdf%7FEnglish%7FENG_DS_1773204-3_1.pdf%7F4-2176347-694, Composition="Thick Film", Device Class L1="Passive Components", Device Class L2=Resistors, Device Class L3="Chip SMD Resistors", Height=0.65mm, Ipc Land Pattern Name=RESC310155X55, Lead Free=Yes, Manufacturer Part Number=CRGCQ1206F1K0, Octopart=https://octopart.com/crgcq1206f1k0-te+connectivity-91018258, RoHS=TRUE, Series=CRGCQ
R16 R17 R19: library part CMP-03211-000516-1, "CRGCQ 0603 1K2 1%", Ambient Temperature Range High=+70°C, Manufacturer="TE Connectivity", Package=CRGCQ0603, Power Rating=0.1W, Resistance=1.2KΩ, Temperature="-55°C to +155°C", Temperature Coefficient=±100ppm/°C, Temperature Range High=+155°C, Temperature Range Low=-55°C, Tolerance=0.01, Voltage Rating=75V, Category=Res, ComponentLink2Description=Datasheet, ComponentLink2URL=https://www.te.com/commerce/DocumentDelivery/DDEController?Action=showdoc&DocId=Data+Sheet%7F1773204-3%7F1%7Fpdf%7FEnglish%7FENG_DS_1773204-3_1.pdf%7F4-2176339-710, Composition="Thick Film", Device Class L1="Passive Components", Device Class L2=Resistors, Device Class L3="Chip SMD Resistors", Digikey Description="CRGCQ 0603 1K2 1%", Height=0.55mm, Ipc Land Pattern Name=RESC16080X45, Lead Free=Yes, Manufacturer Part Number=CRGCQ0603F1K2, Octopart=https://octopart.com/crgcq0603f1k2-te+connectivity-91018051, RoHS=TRUE, Series=CRGCQ
R18: library part CMP-13261-004107-1, "Res Thick Film 1206 2kΩ 5% 0.25W ±100ppm/°C Molded SMD T/R", Case Code (Imperial)=1206, Case Code (Metric)=3216, Max Operating Temperature=155°C, Max Power Dissipation=250mW, Min Operating Temperature=-55°C, Resistance=2kR, Temperature Coefficient=100ppm/°C, Tolerance=5%, Voltage Rating (DC)=200V, Case/Package=1206, Composition="Thick Film", Contact Plating=Tin, Depth=1.6mm, Features="Moisture Resistant", Height=0.026inch, Lead Free="Lead Free", Length=0.126inch, Number of Terminations=2, Packaging="Tape and Reel", Radiation Hardening=No, Width=0.063inch
SW1: library part CMP-10040-000033-1, "TACT 4.5 X 4.5, 3.8 MM H, 2.5N,", Max Operating Temperature=70°C, Min Operating Temperature=-20°C, Operating Force=250gf, Ratings=IP40, Actuator Type=Standard, Illumination Type=Non-Illuminated, Mechanical Life=100000Cycles, Mount="Surface Mount", Packaging="Tape and Reel", Switch Function=Off-Mom, Switch Travel=0.25mm, Termination="Gull Wing", Throw Configuration=SPST
U1: library part CMP-07128-000033-1, "IC REG LINEAR 5V 1A DPAK", Case/Package=DPAK, Dropout Voltage=2V, Max Input Voltage=35V, Max Operating Temperature=125°C, Max Output Current=1A, Max Output Voltage=5.2V, Min Input Voltage=10V, Min Operating Temperature=0°C, Min Output Voltage=5V, Output Voltage Accuracy=4%, Package Quantity=1, Power Supply Rejection Ratio (PSRR)=83dB, Quiescent Current=3.2mA, Accuracy=4%, Contact Plating=Tin, Halogen Free="Halogen Free", Height=2.38mm, Lead Free="Lead Free", Length=6.73mm, Mount="Surface Mount", Nominal Output Voltage=5V, Number Of Outputs=1, Number of Pins=3, Number of Regulators=1, Output Current=1A, Output Type=Fixed, Output Voltage=5V, Packaging="Tape and Reel", Polarity=Positive, Radiation Hardening=No, REACH SVHC="No SVHC", Width=6.22mm
U2: library part CMP-0244-00272-2, "IC REG LINEAR POS ADJ 100MA 8SO", Case/Package=SO, Max Input Voltage=40V, Max Operating Temperature=125°C, Max Output Current=200mA, Max Output Voltage=37V, Min Input Voltage=4.2V, Min Operating Temperature=0°C, Min Output Voltage=1.2V, Output Current=100mA, Package Quantity=1, Power Supply Rejection Ratio (PSRR)=80dB, Reference Voltage=1.3V, Tolerance=5%, Contact Plating=Tin, Height=1.25mm, Lead Free="Lead Free", Length=5mm, Mount="Surface Mount", Number Of Outputs=1, Number of Pins=8, Number of Regulators=1, Output Type=Adjustable, Output Voltage=37V, Packaging="Tape and Reel", Polarity=Positive, Radiation Hardening=No, REACH SVHC="No SVHC", Weight=0.01787oz, Width=4mm
Y1: library part CMP-27762-003430-2, "Crystal 32.768kHz ±10ppm (Tol) 9pF FUND 90kΩ 2-Pin Mini-CSMD T/R", Case/Package=CSMD, ESR (Equivalent Series Resistance)=90kR, Frequency=32.768kHz, Frequency Tolerance=10ppm, Load Capacitance=9pF, Max Operating Temperature=85°C, Min Operating Temperature=-40°C, Package Quantity=3000, Depth=1.2mm, Height=0.6mm, Length=2mm, Mount="Surface Mount", Number of Pins=2, Packaging="Tape and Reel", Radiation Hardening=No, REACH SVHC="No SVHC", RoHS Compliant=Yes, Series=ABS06, Series Resistance=90kR, Termination=SMD/SMT, Tolerance=10ppm, Width=1.2mm
Y2: library part CMP-27762-015229-1, "Crystal 24MHz ±30ppm (Tol) ±30ppm (Stability) 10pF FUND 60Ω 4-Pin SMD T/R", Case/Package=CSMD, ESR (Equivalent Series Resistance)=60R, Frequency=24MHz, Frequency Stability=30ppm, Load Capacitance=10pF, Max Operating Temperature=70°C, Min Operating Temperature=-20°C, Operating Frequency="24 MHz", Package Quantity=1000, Depth=2.5mm, Frequency Tolerance=30ppm, Height=1mm, Lead Free="Lead Free", Length=3.2mm, Mount="Surface Mount", Number of Pins=4, Packaging="Tape and Reel", Series=ABM8G, Series Resistance=60R, Termination=SMD/SMT, Tolerance=30ppm, Width=2.5mm

## Free pads (board coordinates)
  round 4.5 hole 3.2: 10(4.315,51.154) 10(4.32,4.44) 10(82.18,4.44) 10(82.18,51.18)
  round 0.6 hole 0.3 mask+0.102: 11(12.937,25.878) 11(13.26,28.12) 11(13.5,32.52) 11(13.58,24.74) 11(13.58,30.06) 11(31.438,19.48) 11(37.186,18.564) 11(37.46,15.039) 11(37.76,16.34) 11(38.06,17.52) 11(39.334,16.464) 11(39.922,37.54) 11(41.26,39.04) 11(43.16,44) 11(50.86,29.42) 11(52.165,28.56) 11(55.853,25.56) 11(58.6,15.052) 11(59.042,15.807) 11(65.067,16.608) 11(65.744,25.232) 11(65.744,39.48) 11(65.82,15.322)
  round 1 hole 0.762 mask+0.102: 12(31.271,51.6)

## Via types
v1: diameter 0.6, hole 0.3, Top Layer to Bottom Layer, tented both sides, 369 vias

## Nets (pads, with @x,y where several pads share a name; then routed paths per layer and width w, separated by ;. In a path a pad name is that pad's centre, name@x,y a point inside that pad or via, vN(x,y) a via of type N, cw(c..) or ccw(c..) an arc to the next point about the centre after c; other vN are vias at no path point)
+5: C12.1 C14.1 P1.4 pad.12 U1.3 U2.1 | length 101.7
  Top Layer w0.5: U1.3 27.695,48.504 C12.1 31.3,50.631 ; pad.12@31.34,51.6 31.3,51.56 31.3,50.631 ; U2.1 34.831,48.583 34.831,50.556 C14.1 31.3,50.631
  Bottom Layer w0.5: pad.12 31.367,51.696 31.704,51.696 31.814,51.805 50.076,51.805 61.052,40.829 61.052,13.781 64.5,10.333 64.5,6.03 62.43,3.96 49.5,3.96 P1.4
ACAN_H: D3.1 IC3.6 J4.2 R28.1 | length 10.5
  Top Layer w0.5: IC3.6 70.851,35 71.699,35 72.049,34.65 D3.1 77.918,34.65 78.903,35.635 J4.2
BCAN_L: D3.2 IC3.7 J4.3 R28.2 | length 11.1
  Top Layer w0.5: IC3.7 70.851,36.27 71.769,36.27 72.049,36.55 D3.2 77.398,36.55 78.828,37.98 J4.3@79.26,37.98 ; J4.3 J4.3@79.138,37.98
GND: C1.1 C2.1 C3.1 C4.1 C5.1 C6.1 C7.1 C8.2 C9.2 C11.2 C12.2 C13.1 C14.2 C15.2 D1.1 D2.3 D3.3 D4.3 IC1.7 IC2.2 IC3.5 IC5.2 J1.2 J2.1 J4.1 J7.6 J7.G1 J7.G2 J7.G3 J7.G4 J8.1 P1.3 pad.11@58.6,15.052 pad.11@59.042,15.807 pad.11@65.067,16.608 Q1.3 R1.2 R3.2 R4.2 R5.1 R11.1 R12.2 R13.1 R15.2 R16.1 R18.1 SW1.1 SW1.2 U1.4 Y2.2 Y2.4 | length 3.5
  Top Layer w0.2: C5.1 28.645,24.09 Y2.2 ; Y2.4 32.892,22.751 C6.1
  other v1: 4.6,1.6 7.6,1.6 10.6,1.6 13.6,1.6 16.6,1.6 19.6,1.6 22.6,1.6 25.6,1.6 28.6,1.6 31.6,1.6 34.6,1.6 37.6,1.6 40.6,1.6 43.6,1.6 46.6,1.6 49.6,1.6 52.6,1.6 55.6,1.6 58.6,1.6 61.6,1.6 64.6,1.6 67.6,1.6 70.6,1.6 73.6,1.6 76.6,1.6 79.6,1.6 82.6,1.6 9.1,4.6 12.1,4.6 15.1,4.6 18.1,4.6 21.1,4.6 33.1,4.6 36.1,4.6 39.1,4.6 42.1,4.6 69.1,4.6 72.1,4.6 75.1,4.6 78.1,4.6 1.6,7.6 4.6,7.6 7.6,7.6 10.6,7.6 13.6,7.6 16.6,7.6 22.6,7.6 25.6,7.6 28.6,7.6 31.6,7.6 34.6,7.6 37.6,7.6 46.6,7.6 49.6,7.6 52.6,7.6 55.6,7.6 58.6,7.6 61.6,7.6 67.6,7.6 70.6,7.6 73.6,7.6 76.6,7.6 79.6,7.6 82.6,7.6 3.1,10.6 6.1,10.6 9.1,10.6 12.1,10.6 15.1,10.6 18.1,10.6 27.1,10.6 33.1,10.6 36.1,10.6 39.1,10.6 42.1,10.6 45.1,10.6 48.1,10.6 51.1,10.6 54.1,10.6 60.1,10.6 69.1,10.6 72.1,10.6 75.1,10.6 78.1,10.6 81.1,10.6 84.1,10.6 1.6,13.6 4.6,13.6 7.6,13.6 10.6,13.6 13.6,13.6 16.6,13.6 19.6,13.6 28.6,13.6 34.6,13.6 37.6,13.6 40.6,13.6 43.6,13.6 67.6,13.6 73.6,13.6 76.6,13.6 79.6,13.6 82.6,13.6 3.1,16.6 6.1,16.6 9.1,16.6 75.1,16.6 78.1,16.6 81.1,16.6 84.1,16.6 1.6,19.6 4.6,19.6 7.6,19.6 16.6,19.6 19.6,19.6 22.6,19.6 49.6,19.6 52.6,19.6 55.6,19.6 70.6,19.6 73.6,19.6 76.6,19.6 79.6,19.6 82.6,19.6 59.342,20.485 63.1,20.485 38.712,20.684 39.823,20.684 48.307,21.822 51.143,21.822 3.1,22.6 6.1,22.6 9.1,22.6 15.1,22.6 18.1,22.6 21.1,22.6 24.1,22.6 69.1,22.6 75.1,22.6 78.1,22.6 81.1,22.6 84.1,22.6 41.543,23.607 42.654,23.607 43.764,23.607 44.874,23.607 45.985,23.607 47.095,23.607 41.543,24.562 42.654,24.562 43.764,24.562 44.874,24.562 45.985,24.562 47.095,24.562 41.566,25.461 42.676,25.461 43.787,25.461 44.897,25.461 46.008,25.461 47.118,25.461 1.6,25.6 4.6,25.6 7.6,25.6 25.6,25.6 28.6,25.6 31.6,25.6 52.6,25.6 58.6,25.6 76.6,25.6 82.6,25.6 41.566,26.415 42.676,26.415 43.787,26.415 44.897,26.415 46.008,26.415 47.118,26.415 41.576,27.305 42.687,27.305 43.797,27.305 44.908,27.305 46.018,27.305 47.128,27.305 41.576,28.26 42.687,28.26 43.797,28.26 44.908,28.26 46.018,28.26 47.128,28.26 3.1,28.6 6.1,28.6 9.1,28.6 21.1,28.6 36.1,28.6 51.1,28.6 54.1,28.6 60.1,28.6 63.1,28.6 69.1,28.6 75.1,28.6 78.1,28.6 81.1,28.6 84.1,28.6 13.584,29.243 16.6,29.243 1.6,31.6 7.6,31.6 16.6,31.6 25.6,31.6 34.6,31.6 37.6,31.6 40.6,31.6 43.6,31.6 46.6,31.6 49.6,31.6 54.171,31.6 58.6,31.6 64.6,31.6 67.6,31.6 70.6,31.6 73.6,31.6 76.6,31.6 79.6,31.6 82.6,31.6 3.1,34.6 6.1,34.6 9.1,34.6 12.1,34.6 18.1,34.6 21.1,34.6 27.1,34.6 30.1,34.6 33.1,34.6 36.1,34.6 39.1,34.6 45.1,34.6 48.1,34.6 60.1,34.6 81.1,34.6 84.1,34.6 1.6,37.6 4.6,37.6 7.6,37.6 10.6,37.6 13.6,37.6 16.6,37.6 19.6,37.6 22.6,37.6 37.6,37.6 46.6,37.6 67.6,37.6 73.6,37.6 76.6,37.6 82.6,37.6 3.1,40.6 6.1,40.6 9.1,40.6 12.1,40.6 15.1,40.6 18.1,40.6 21.1,40.6 24.1,40.6 27.1,40.6 39.1,40.6 42.1,40.6 45.1,40.6 60.1,40.6 63.1,40.6 66.1,40.6 72.1,40.6 75.1,40.6 78.1,40.6 81.1,40.6 84.1,40.6 1.6,43.6 7.6,43.6 10.6,43.6 13.6,43.6 37.6,43.6 52.6,43.6 55.6,43.6 61.6,43.6 64.6,43.6 67.6,43.6 70.6,43.6 73.6,43.6 76.6,43.6 79.6,43.6 82.6,43.6 18.319,43.697 19.43,43.697 20.54,43.697 21.379,43.712 22.49,43.712 23.6,43.712 18.33,44.587 19.44,44.587 20.55,44.587 21.39,44.602 22.5,44.602 23.61,44.602 18.33,45.542 19.44,45.542 20.55,45.542 21.39,45.557 22.5,45.557 23.61,45.557 18.33,46.415 19.44,46.415 20.55,46.415 21.39,46.415 22.5,46.415 23.61,46.415 3.1,46.6 27.1,46.6 39.1,46.6 42.1,46.6 51.1,46.6 54.1,46.6 57.1,46.6 60.1,46.6 63.1,46.6 66.1,46.6 69.1,46.6 72.1,46.6 75.1,46.6 78.1,46.6 81.1,46.6 84.1,46.6 18.34,47.305 19.45,47.305 20.561,47.305 21.4,47.305 22.51,47.305 23.621,47.305 18.34,48.26 19.45,48.26 20.561,48.26 21.4,48.26 22.51,48.26 23.621,48.26 1.6,49.6 7.6,49.6 19.6,49.6 22.6,49.6 37.6,49.6 40.6,49.6 43.6,49.6 55.6,49.6 58.6,49.6 61.6,49.6 64.6,49.6 67.6,49.6 70.6,49.6 73.6,49.6 76.6,49.6 79.6,49.6 9.1,52.6 12.1,52.6 48.1,52.6 51.1,52.6 54.1,52.6 57.1,52.6 60.1,52.6 63.1,52.6 66.1,52.6 69.1,52.6 72.1,52.6 75.1,52.6 78.1,52.6
INPUT: D5.1 J1.1 J5.2 Q2.5-6-7-8 | length 53.1
  Top Layer w0.5: 42.518,53.02 42.573,52.965 D5.1
  Top Layer w1: J1.1 9.074,47.779 ; Q2.5-6-7-8 9.074,47.779 ; J5.2 44.175,53.02 42.518,53.02 14.315,53.02 9.074,47.779
NetC1_2: C1.2 IC1.2 Y1.2 | length 12.3
  Top Layer w0.2: C1.2 33.332,31.232 Y1.2 31.526,31.144 31.526,30.349 33.966,27.91 IC1.2
NetC2_2: C2.2 IC1.3 Y1.1 | length 14.1
  Top Layer w0.2: C2.2 Y1.1 29.988,30.274 30.106,30.157 31.027,30.157 33.774,27.41 IC1.3
NetC5_2: C5.2 IC1.9 Y2.3 | length 14
  Top Layer w0.2: C5.2 28.919,22.84 29.507,22.251 29.681,22.251 30.081,21.851 34.319,21.851 36.877,24.41 IC1.9
NetC6_2: C6.2 IC1.8 Y2.1 | length 9.3
  Top Layer w0.2: Y2.1 32.422,24.451 32.857,24.016 C6.2 33.858,24.016 34.752,24.91 IC1.8
NetC13_2: C13.2 Q2.1 Q2.2 Q2.3 U1.1 | length 18.3
  Top Layer w0.5: 16.535,48.077 Q2.2 Q2.1 16.535,45.445 16.296,45.206 16.296,44.962 16.071,44.737 C13.2 16.071,42.758 16.669,42.16 24.771,42.16 26.113,43.502 28.013,43.502 U1.1
NetD1_2: D1.2 R10.2 | length 3.2
  Top Layer w0.2: R10.2 52.872,15.039 D1.2
NetD2_1: D2.1 IC2.7 J3.2 R2.1 | length 10.1
  Top Layer w0.5: IC2.7 73.926,26.453 74.355,26.882 J3.2
NetD2_2: D2.2 IC2.6 J3.1 R2.2 | length 10.2
  Top Layer w0.5: IC2.6 74.119,25.183 74.92,24.382 J3.1
NetD4_1: D4.1 IC5.7 J9.2 R27.1 | length 10.2
  Top Layer w0.5: IC5.7@69.304,16.552 73.623,16.552 74.893,17.822 J9.2
NetD4_2: D4.2 IC5.6 J9.1 R27.2 | length 10
  Top Layer w0.5: IC5.6@69.304,15.282 73.036,15.282 73.101,15.217 D4.2@73.51,15.217 ; D4.2 73.785,15.267 73.785,15.225 74.078,14.933 77.293,14.933 77.683,15.322 J9.1
NetD5_2: D5.2 J5.1 Q1.2 | length 13.6
  Top Layer w0.5: D5.2 49.114,48.497 49.38,48.23
  Top Layer w1: J5.1 49.38,50.315 49.38,48.23 49.38,44.08 Q1.2
NetIC1_11: IC1.11 J6.1 R4.1 | length 34.5
  Top Layer w0.2: J6.1 R4.1 20.633,9.713 20.84,9.92 20.84,12.694 23.985,15.839 34.699,15.839 35.18,16.32 35.18,21.054 37.536,23.41 IC1.11
NetIC1_12: IC1.12 J6.3 R3.1 | length 29.7
  Top Layer w0.2: J6.3 R3.1 25.792,9.713 25.909,9.83 25.909,13.469 27.879,15.439 34.864,15.439 35.58,16.154 35.58,20.695 37.795,22.91 IC1.12
NetIC1_13: IC1.13 J6.5 R1.1 | length 25.4
  Top Layer w0.2: J6.5 29.659,9.686 30.946,9.686 31.063,9.803 31.063,13.524 32.578,15.039 35.03,15.039 35.98,15.989 35.98,18.94 36.42,19.38 40.476,19.38 41.41,20.314 IC1.13
NetIC1_14: IC1.14 J7.CD1 pad.11@13.5,32.52 pad.11@37.186,18.564 R14.1 | length 57.6
  Top Layer w0.2: pad.11@13.5,32.52 15.199,32.52 R14.1@18.087,32.52 ; R14.1@18.087,32.619 R14.1@18.11,32.643 ; pad.11@37.186,18.564 41.534,18.564 41.91,18.94 IC1.14
  Top Layer w0.5: J7.CD1 R14.1@18.11,32.543
  Bottom Layer w0.2: pad.11@13.5,32.52 13.466,32.486 12.701,32.486 11.7,31.485 11.7,18.72 13.52,16.9 36.84,16.9 37.186,17.246 pad.11@37.186,18.564
NetIC1_19: IC1.19 IC5.4 | length 27.2
  Top Layer w0.2: IC1.19 44.41,14.862 46.212,13.06 55.766,13.06 56.718,14.012 IC5.4@63.88,14.012
NetIC1_20: IC1.20 IC5.1 | length 27.7
  Top Layer w0.2: IC1.20 44.91,15.189 46.639,13.46 55.418,13.46 59.772,17.814 63.872,17.814 IC5.1@63.88,17.822
NetIC1_22: IC1.22 P1.1 | length 60.9
  Top Layer w0.2: P1.1 40.46,7.73 42.56,9.83 62.197,9.83 66.592,14.225 66.592,18.078 66.003,18.667 65.994,18.667 65.814,18.847 59.16,18.847 56.377,16.064 48.549,16.064 45.91,18.703 IC1.22
NetIC1_23: IC1.23 P1.2 | length 58.7
  Top Layer w0.2: P1.2 42.96,7.43 44.864,9.334 62.267,9.334 66.992,14.059 66.992,18.244 65.989,19.247 58.994,19.247 56.211,16.464 48.715,16.464 46.41,18.769 IC1.23
NetIC1_24: IC1.24 R10.1 | length 6.3
  Top Layer w0.2: IC1.24 46.91,19.214 48.483,17.641 R10.1
NetIC1_29: IC1.29 IC3.2 IC3.3 | length 36.1
  Top Layer w0.2: IC1.29 53.575,24.91 55.414,23.071 65.535,23.071 66.592,24.128 66.592,34.648 66.24,35 ; IC3.3 66.24,35 ; IC3.2 64.97,36.27 66.24,35
NetIC1_32: IC1.32 pad.11@43.16,44 pad.11@55.853,25.56 R19.1 | length 38.2
  Top Layer w0.2: pad.11@43.16,44 44.535,44 R19.1 ; IC1.32 55.003,26.41 pad.11@55.853,25.56
  Bottom Layer w0.2: pad.11@43.16,44 43.68,44 46.625,41.055 54.545,41.055 56.12,39.48 56.12,25.877 55.853,25.61 pad.11@55.853,25.56
NetIC1_33: IC1.33 IC2.4 | length 16.5
  Top Layer w0.2: IC1.33 56.07,26.91 59.067,23.913 IC2.4
NetIC1_34: IC1.34 IC2.1 | length 15.4
  Top Layer w0.2: IC1.34 55.853,27.41 56.166,27.723 IC2.1
NetIC1_40: IC1.40 IC3.4 | length 20.9
  Top Layer w0.2: IC1.40 45.41,31.757 45.91,32.257 52.391,32.257 53.864,33.73 IC3.4
NetIC1_41: IC1.41 IC3.1 | length 23.1
  Top Layer w0.2: IC1.41 44.91,31.912 45.76,32.762 51.982,32.762 56.761,37.54 IC3.1
NetIC1_47: IC1.47 J8.2 pad.11@41.26,39.04 | length 67.9
  Top Layer w0.2: pad.11@41.26,39.04 41.26,36.806 41.91,36.156 IC1.47
  Bottom Layer w0.2: pad.11@41.26,39.04 40.415,39.885 40.415,42.835 42.18,44.6 43.646,44.6 46.791,41.455 54.859,41.455 56.52,39.794 56.52,8.045 J8.2
NetIC1_48: IC1.48 J8.3 pad.11@39.922,37.54 | length 70.1
  Top Layer w0.2: pad.11@39.922,37.54 39.96,37.54 41.41,36.09 IC1.48
  Bottom Layer w0.2: pad.11@39.922,37.54 39.922,42.908 42.014,45 43.811,45 46.956,41.855 55.025,41.855 56.92,39.96 56.92,10.145 J8.3
NetQ1_1: Q1.1 R5.2 R19.2 | length 3.8
  Top Layer w1: R5.2 R19.2 47.381,44.079 Q1.1
NetQ2_4: Q2.4 R16.2 | length 4.6
  Top Layer w0.5: R16.2 16.847,50.852 17.508,50.192 17.508,49.259 17.215,48.966 16.542,48.966 Q2.4
NetR17_1: R17.1 R18.2 U2.4 | length 12.2
  Top Layer w0.5: U2.4 30.971,46.808 30.107,45.944 30.107,40.536 30.4,40.243 R18.2 31.523,40.254 R17.1
NRST: C7.2 IC1.10 J2.5 pad.11@31.438,19.48 SW1.3 SW1.4 | length 60
  Top Layer w0.2: C7.2 26.94,19.689 27.415,20.164 SW1.4 31.438,20.164 ; pad.11@31.438,19.48 31.438,20.164 ; IC1.10 37.186,23.91 34.759,21.483 34.759,20.564 34.359,20.164 SW1.3 31.438,20.164
  Bottom Layer w0.2: pad.11@31.438,19.48 24.26,19.48 23.02,20.719 23.02,33.202 25.137,35.319 41.554,35.319 42.865,36.63 J2.5
SD_CS: IC1.15 J7.2 pad.11@13.58,24.74 pad.11@38.06,17.52 R9.1 | length 53.5
  Top Layer w0.2: pad.11@13.58,24.74 15.095,24.74 J7.2 ; pad.11@38.06,17.52 38.659,18.119 41.932,18.119 42.41,18.597 IC1.15
  Top Layer w0.5: J7.2 15.299,24.743 16.296,24.743 17.123,23.916 17.938,23.916 R9.1
  Bottom Layer w0.2: pad.11@13.58,24.74 13.58,26.468 13.368,26.68 12.312,26.68 12.1,26.468 12.1,18.9 13.58,17.42 36.163,17.42 36.32,17.577 36.32,18.963 36.737,19.38 37.706,19.38 38.06,19.026 pad.11@38.06,17.52
SD_MISO: IC1.17 J7.7 pad.11@13.58,30.06 pad.11@39.334,16.464 R6.1 | length 64.8
  Top Layer w0.2: pad.11@13.58,30.06 13.614,30.06 13.897,30.343 J7.7 ; pad.11@39.334,16.464 42.06,16.464 43.41,17.814 IC1.17
  Top Layer w0.5: J7.7 R6.1
  Bottom Layer w0.2: pad.11@13.58,30.06 13.58,30.911 14.766,32.097 14.766,33.114 14.076,33.804 12.682,33.804 10.84,31.963 10.84,18.449 13.549,15.74 38.611,15.74 pad.11@39.334,16.464
SD_MOSI: IC1.18 J7.3 pad.11@12.937,25.878 pad.11@37.46,15.039 R8.1 | length 58
  Top Layer w0.2: pad.11@12.937,25.878 15.134,25.878 J7.3 ; pad.11@37.46,15.039 41.36,15.039 43.91,17.589 IC1.18
  Top Layer w0.5: J7.3 R8.1
  Bottom Layer w0.2: pad.11@12.937,25.878 12.58,25.522 12.58,19.086 13.706,17.96 35.803,17.96 35.92,18.077 35.92,19.163 36.537,19.78 37.872,19.78 39.934,17.718 39.934,16.195 38.778,15.039 pad.11@37.46,15.039
SD_SCK: IC1.16 J7.5 pad.11@13.26,28.12 pad.11@37.76,16.34 R7.1 | length 64.8
  Top Layer w0.2: pad.11@13.26,28.12 15.175,28.12 J7.5 ; pad.11@37.76,16.34 38.94,17.52 42.21,17.52 42.91,18.22 IC1.16
  Top Layer w0.5: J7.5 R7.1
  Bottom Layer w0.2: pad.11@13.26,28.12 12.737,28.12 12.62,28.237 12.62,31.076 13.164,31.62 13.7,31.62 14.335,32.255 14.335,32.823 13.789,33.368 12.948,33.368 11.24,31.66 11.24,18.614 13.514,16.34 pad.11@37.76,16.34
SHDN1: IC1.27 IC2.5 R12.1 | length 24.4
  Top Layer w0.2: IC1.27 53.376,23.91 55.015,22.271 65.941,22.271 67.579,23.908 IC2.5@69.538,23.908
  Top Layer w0.5: IC2.5@69.538,23.908 71.453,23.908 R12.1
SHDN2: IC1.25 IC5.5 R15.1 | length 29.7
  Top Layer w0.2: IC1.25 53.093,22.91 54.581,21.422 65.312,21.422 67.579,19.156 67.579,14.577 68.144,14.012 IC5.5@69.304,14.012
  Top Layer w0.5: IC5.5@69.304,14.012 R15.1
STB1: IC1.28 IC2.8 R11.2 | length 27.5
  Top Layer w0.2: IC1.28 53.509,24.41 55.248,22.671 65.701,22.671 67,23.97 67,26.742 67.981,27.723 IC2.8
  Top Layer w0.5: IC2.8 69.07,27.722 71.456,27.722 R11.2
STB2: IC1.26 IC5.8 R13.2 | length 26.4
  Top Layer w0.2: IC1.26 53.243,23.41 54.831,21.822 65.478,21.822 67.979,19.321 67.979,17.94 68.096,17.822 IC5.8@69.304,17.822
  Top Layer w0.5: IC5.8@69.304,17.822 69.328,17.846 71.668,17.846 R13.2
SWCLK: IC1.36 J2.3 pad.11@50.86,29.42 | length 12.5
  Top Layer w0.2: IC1.36 49.85,28.41 pad.11@50.86,29.42
  Bottom Layer w0.2: J2.3 48.715,36.965 48.715,35.898 50.86,33.753 pad.11@50.86,29.42
SWDIO: IC1.35 J2.4 pad.11@52.165,28.56 | length 19.8
  Top Layer w0.2: IC1.35 51.515,27.91 pad.11@52.165,28.56
  Bottom Layer w0.2: J2.4 45.522,37.972 45.522,38.672 45.71,38.86 48.481,38.86 49.115,38.226 49.115,36.064 52.165,33.014 pad.11@52.165,28.56
VDD: C3.2 C4.2 C8.1 C9.1 C11.1 C15.1 IC1.5 IC1.6 IC2.3 IC3.8 IC5.3 J2.2 J6.2 J6.4 J6.6 J7.4 pad.11@65.82,15.322 pad.11@65.744,25.232 pad.11@65.744,39.48 R6.2 R7.2 R8.2 R9.2 R14.2 R17.2 U2.2 U2.3 U2.6 U2.7 | length 232.3
  Top Layer w0.2: C3.2 32.161,28.173 33.924,26.41 ; IC1.6 34.424,25.91 33.924,26.41 ; IC1.5 33.924,26.41